# Altium PCB RHC12-BTA.PcbDoc
Units mil, origin at the board's own origin, x right, y up, seen from the top; angles counter-clockwise.
Board outline 787.4 x 1574.8 mil, 2 copper layers (Top, Bottom), stack 61.811 mil thick; 6 components, 24 nets, 24 pads, 2 vias.
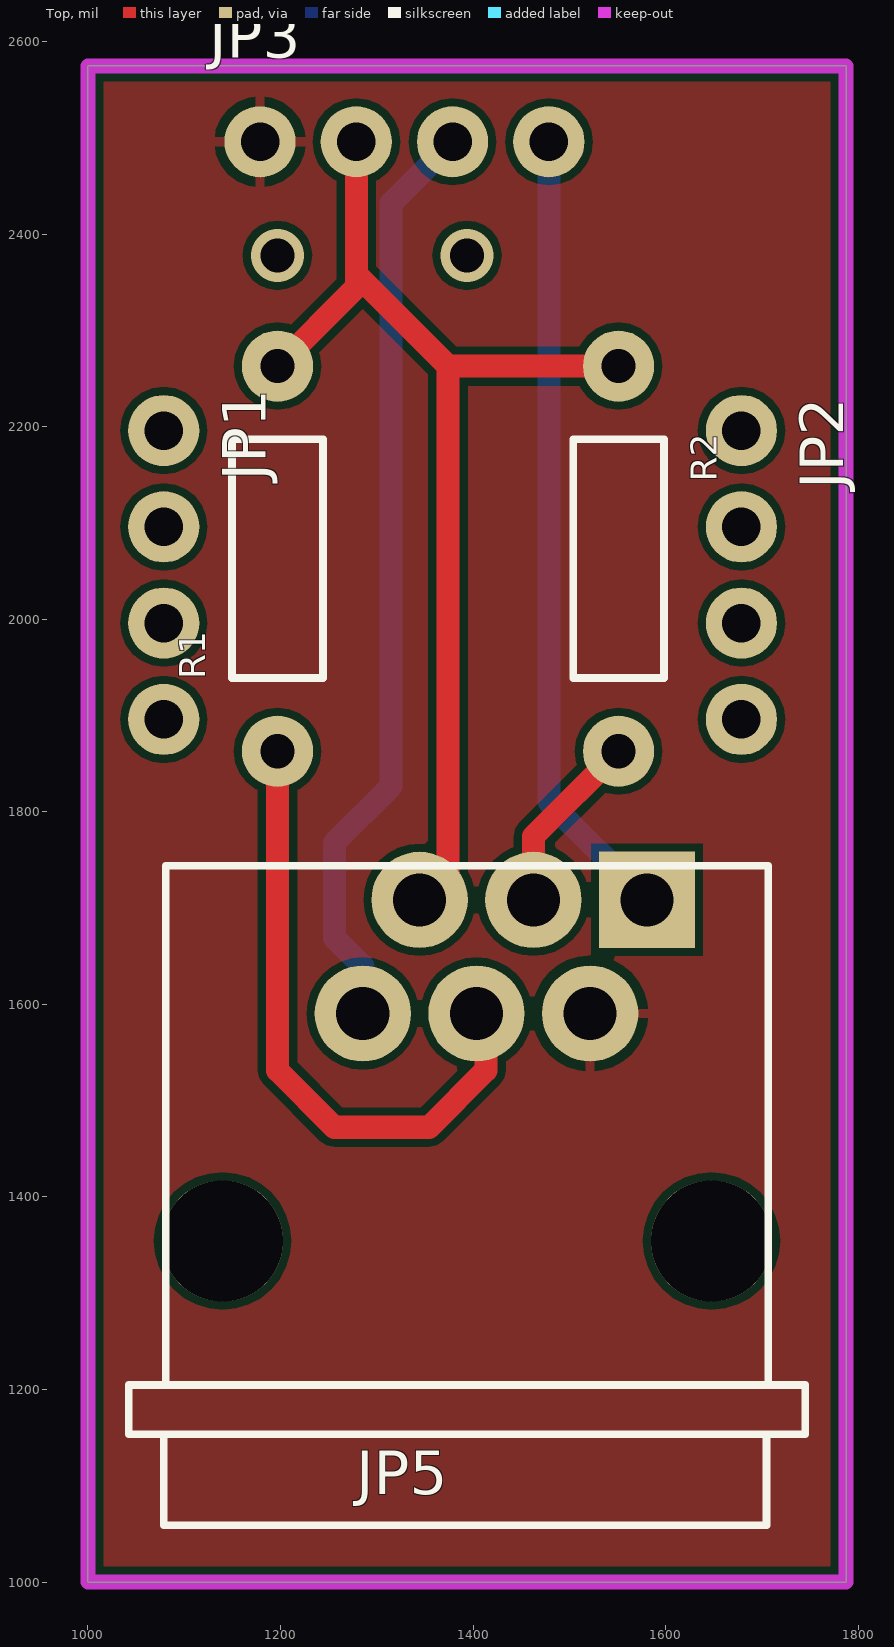
[diagram p0: Top view]
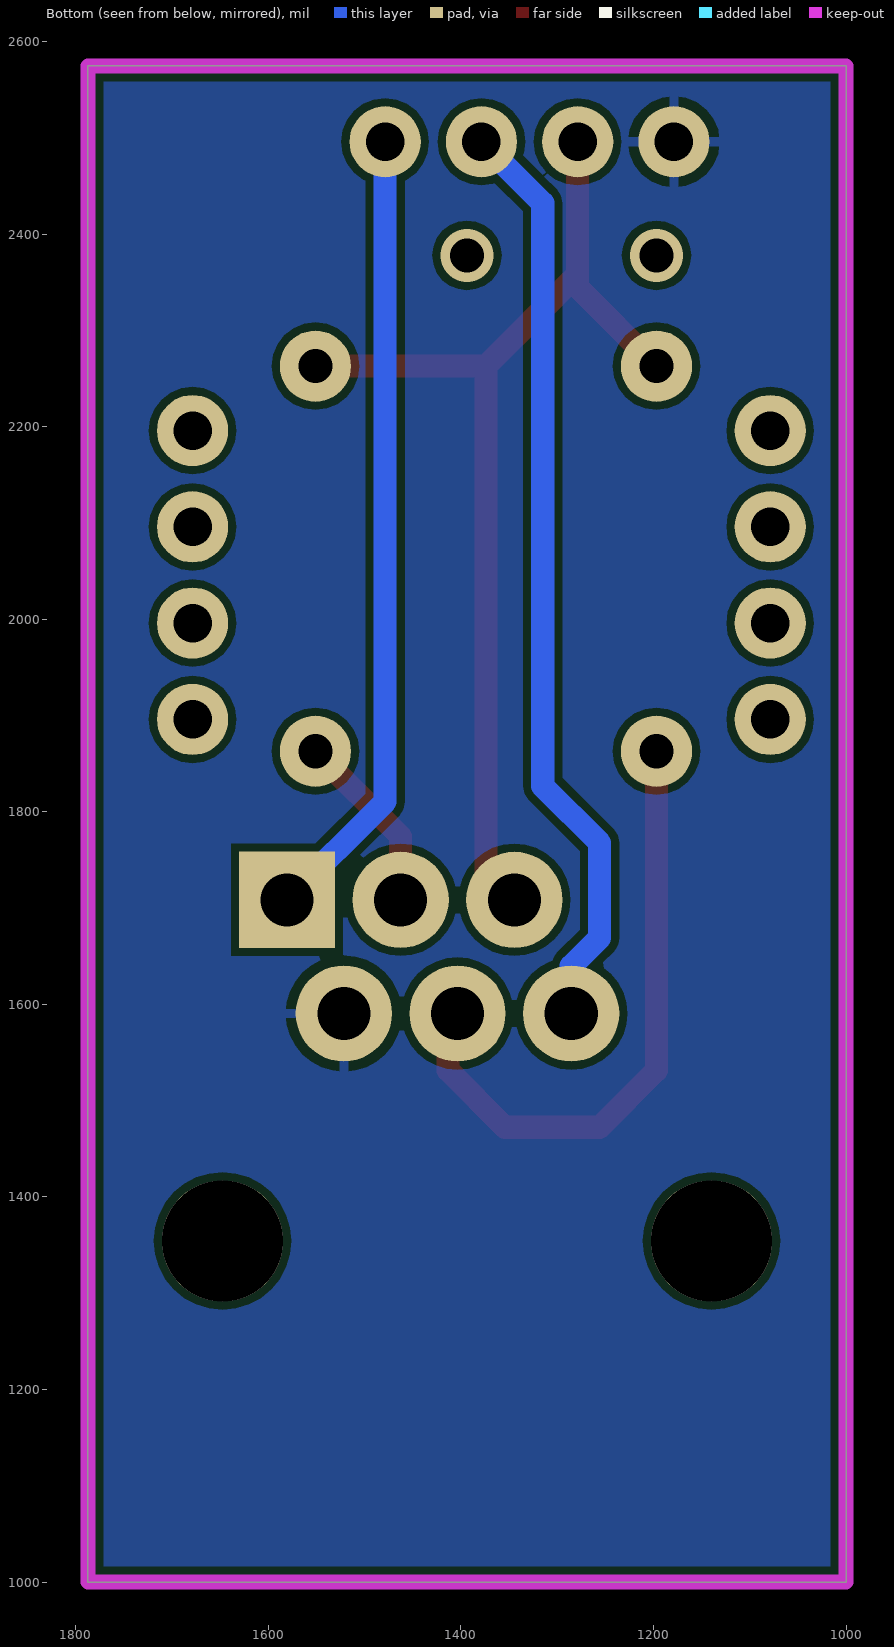
[diagram p1: Bottom view, seen from below]

## Layer stack, top to bottom
Top Solder: solder mask 0.4, Solder Resist, Dk 3.5
Top: signal copper 1.378
Dielectric 1: core 59.0551, FR-4, Dk 4.8
Bottom: signal copper 1.378
Bottom Solder: solder mask 0.4, Solder Resist, Dk 3.5

## Board outline
1000,1000 1787.4,1000 1787.4,2574.8 1000,2574.8

## Design rules (kind name [scope] priority, off if disabled: settings)
Clearance [All] p1: gap=8 except(0: SMDPad-SMDPad SMDPad-THPad SMDPad-Via)
Clearance "Clearance (Same Net)" [All] p2: gap=0 except(8: SMDPad-SMDPad SMDPad-THPad SMDPad-Via)
HoleSize HoleSize_1 [All] p1: absolutevalues=TRUE maxlimit=100000 minlimit=15 maxpercent=80.000 minpercent=20.000
HoleSize [All] p2: absolutevalues=TRUE maxlimit=100 minlimit=1 maxpercent=80.000 minpercent=20.000
HoleToHoleClearance mdViaViaSameLayer [All] p1: gap=8 allowstackedmicrovias=TRUE
HoleToHoleClearance [All] p2: gap=10 allowstackedmicrovias=TRUE
PasteMaskExpansion mlMinCreamFrame [All] p1: expansion=0
PasteMaskExpansion [All] p2: expansion=0
PolygonConnect ThermalVias [IsVia] p1: connectstyle=Direct reliefconductorwidth=10 reliefentries=4 polygonreliefangle="90 Angle" airgapwidth=10
PolygonConnect [All] p2: connectstyle=Relief reliefconductorwidth=10 reliefentries=4 polygonreliefangle="90 Angle" airgapwidth=10
RoutingVias [All] p1: holewidth=28 width=50 viastyle="Through Hole" minholewidth=28 minwidth=50 maxholewidth=28 maxwidth=50
SilkToSilkClearance [All] p1 off: silktosilkclearance=10
SilkToSolderMaskClearance [IsPad] p1 off: minsilkscreentomaskgap=10 clearancetoexposedcopper=TRUE
SolderMaskExpansion mlMinStopFrame [All] p1: expansion=4
SolderMaskExpansion [All] p2: expansion=4
Width Width_1 [All] p1: maxlimit=100000 minlimit=10 preferedwidth=10
Width [All] p2: maxlimit=10 minlimit=10 preferedwidth=10
25 further rules are at their usual default settings.

## Components (designator, comment, footprint, x,y, rotation, side; value= is the part's Value field where it differs from the comment)
JP1 "" 1X04_NO_SILK_ALL_ROUND 1078.74,2196.06 r270 top
JP2 "" 1X04_NO_SILK_ALL_ROUND 1678.74,2196.06 r270 top
JP3 "" 1X04_NO_SILK_ALL_ROUND 1178.74,2496.06 r0 top
JP5 "" BTA 1393.7,1354.33 r0 top
R1 "" AXIAL-0.4 1196.85,2062.99 r90 top
R2 "" AXIAL-0.4 1551.18,2062.99 r270 top

## Footprints (in the part's own frame and the unit in brackets; to place one, negate y for a bottom-side part, rotate by r counter-clockwise, add the part's x,y. Pads: shape width x height; smd on the part's side, far side on the other; paste and mask are expansions set on the pad)
1X04_NO_SILK_ALL_ROUND [mil] "1X04_NO_SILK_ALL_ROUND"
  round 74 hole 40: 1(0,0) 2(100,0) 3(200,0) 4(300,0)
AXIAL-0.4 [mil] "AXIAL-0.4"
  round 74 hole 35.43: P$1(-200,0) P$2(200,0)
  silkscreen extent -124,-47 124,47
BTA [mm] "BTA"
  round 3.2 hole 3.2: 1(-6.45,0) 1(6.45,0)
  rect 2.54x2.54 hole 1.4: 1(4.75,9)
  round 2.54 hole 1.4: 2(3.25,6) 3(1.75,9) 4(0.25,6) 5(-1.25,9) 6(-2.75,6)
  silkscreen extent -8.93,-7.5 8.93,9.9

## Part data
JP1 JP2 JP3: library part 1X04_NO_SILK_ALL_ROUND
JP5: library part BTA
R1 R2: library part AXIAL-0.4

## Via types
v1: diameter 55.43/55.43 (per signal layer), hole 35.43, Top to Bottom, 2 vias

## Nets (pads, with @x,y where several pads share a name; then routed paths per layer and width w, separated by ;. In a path a pad name is that pad's centre, name@x,y a point inside that pad or via, vN(x,y) a via of type N, cw(c..) or ccw(c..) an arc to the next point about the centre after c; other vN are vias at no path point)
5V: JP3.2 JP5.5 R1.P$2 R2.P$1 | length 1145.5
  Top w24: R1.P$2 1278.74,2344.88 1278.74,2358.27 ; JP3.2 1278.74,2358.27 ; JP5.5 1374.02,1738.19 1374.02,2262.99 ; R2.P$1 1374.02,2262.99 ; 1278.74,2358.27 1374.02,2262.99
GND: JP3.1 JP5.2
N$1: JP5.4 R1.P$1 | length 660.1
  Top w24: R1.P$1 1196.85,1531.5 1255.91,1472.44 1354.33,1472.44 1413.39,1531.5 1413.39,1580.71 JP5.4
N$3: JP5.3 R2.P$2 | length 191
  Top w24: JP5.3 1462.6,1774.41 R2.P$2
N$5: 
  other v1: 1196.85,2377.95
N$6: 
  other v1: 1393.7,2377.95
N$7: 
N$10: 
N$11: 
N$12: 
N$13: 
N$14: 
N$15: 
N$16: 
N$17: 
N$18: 
N$19: 
N$20: 
N$21: 
N$22: 
N$23: 
N$27: 
S1: JP3.3 JP5.6 | length 968.6
  Bottom w24: JP5.6 1285.43,1639.76 1255.91,1669.29 1255.91,1767.72 1314.96,1826.77 1314.96,2432.28 JP3.3
S2: JP3.4 JP5.1@1580.71,1708.66 | length 829.6
  Bottom w24: JP3.4 1478.74,1810.63 JP5.1@1580.71,1708.66
pads on no net: JP1.1 JP1.2 JP1.3 JP1.4 JP2.1 JP2.2 JP2.3 JP2.4 JP5.1@1139.76,1354.33 JP5.1@1647.64,1354.33

## Polygon pours and split planes (outlines as drawn)
GND on Top "Top-GND" (hatched 90Degree grid 0.1 track 0.1, remove dead copper, pour order 0): 992,992 1795.4,992 1795.4,2582.8 992,2582.8
GND on Bottom "Bottom-GND" (hatched 90Degree grid 0.1 track 0.1, remove dead copper, pour order 2): 992,992 1795.4,992 1795.4,2582.8 992,2582.8

## Keep-outs
Keep-Out Layer:
  the board outline again, w16

## Silkscreen, mask and mechanical layers (free items; w line width, h text height)
Dimension:
  the board outline again, w16